# Altium PCB microd-header-adapter-board-rev2.PcbDoc
Units mm, origin at the board's own origin, x right, y up, seen from the top; angles counter-clockwise.
Board outline 44 x 66 mm, 2 copper layers (Top Layer, Bottom Layer); 16 components, 21 nets, 73 pads, 0 vias.
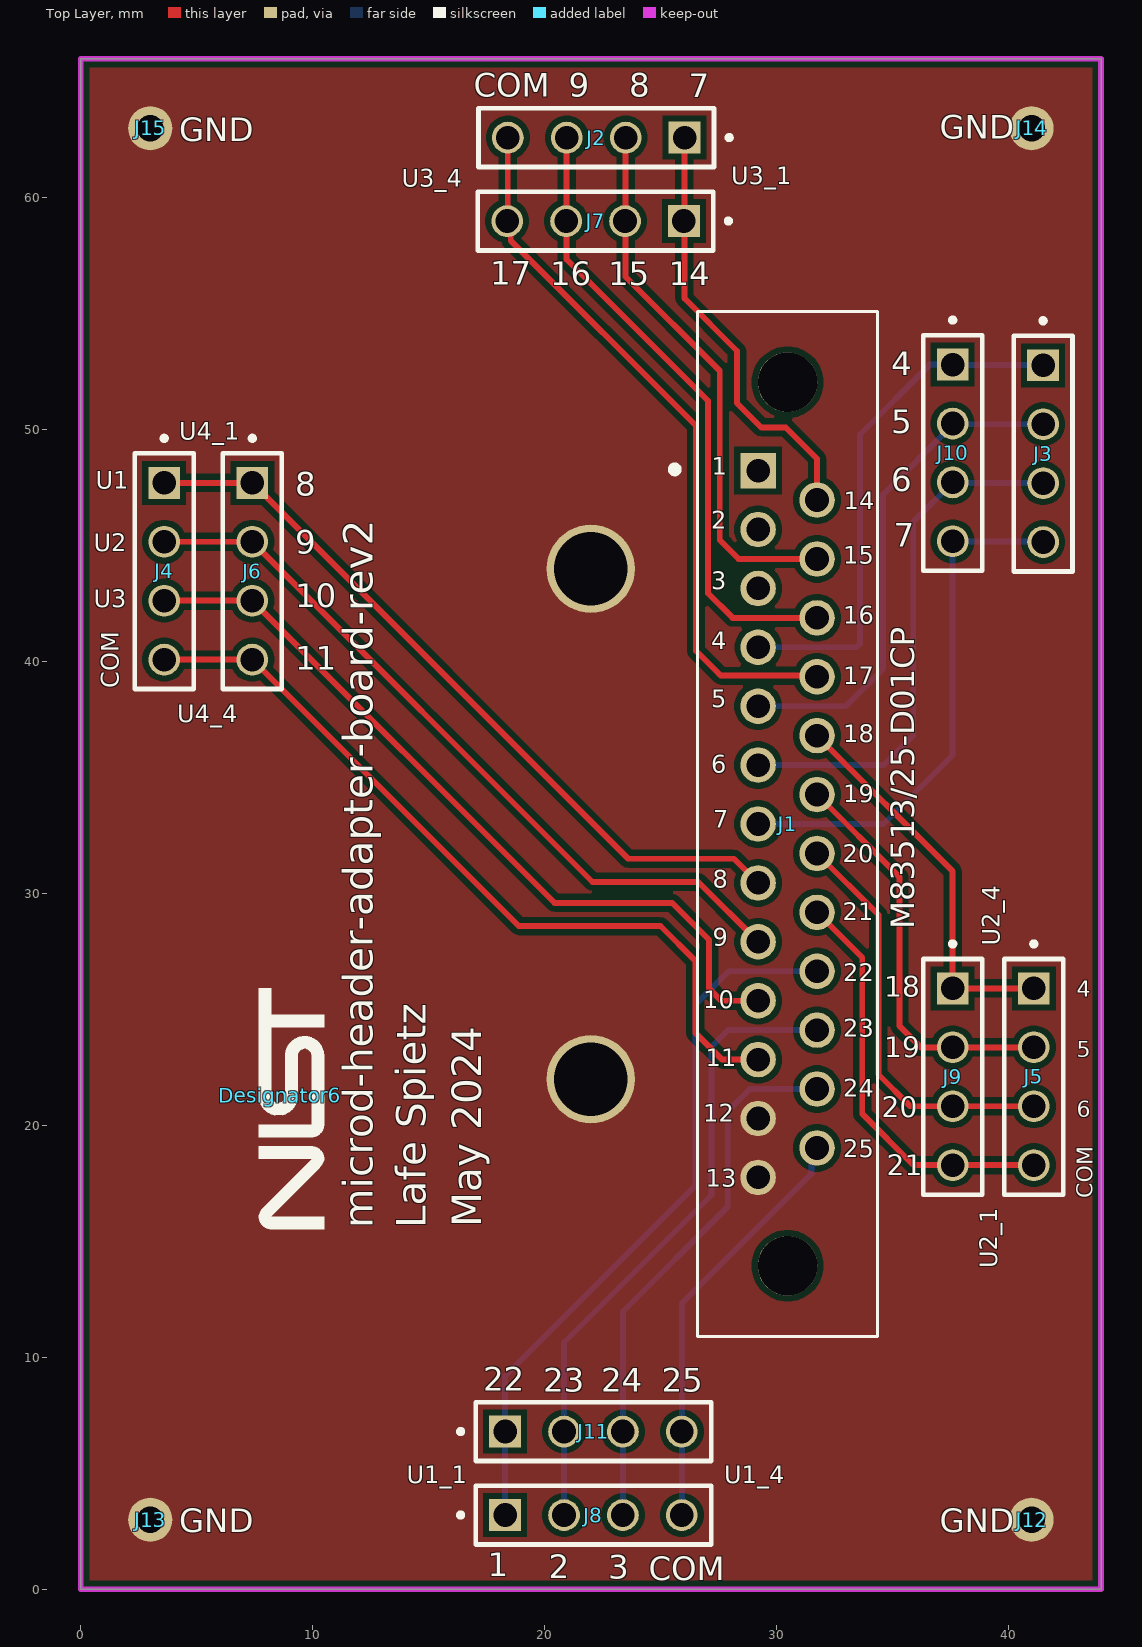
[diagram p0: Top Layer view]
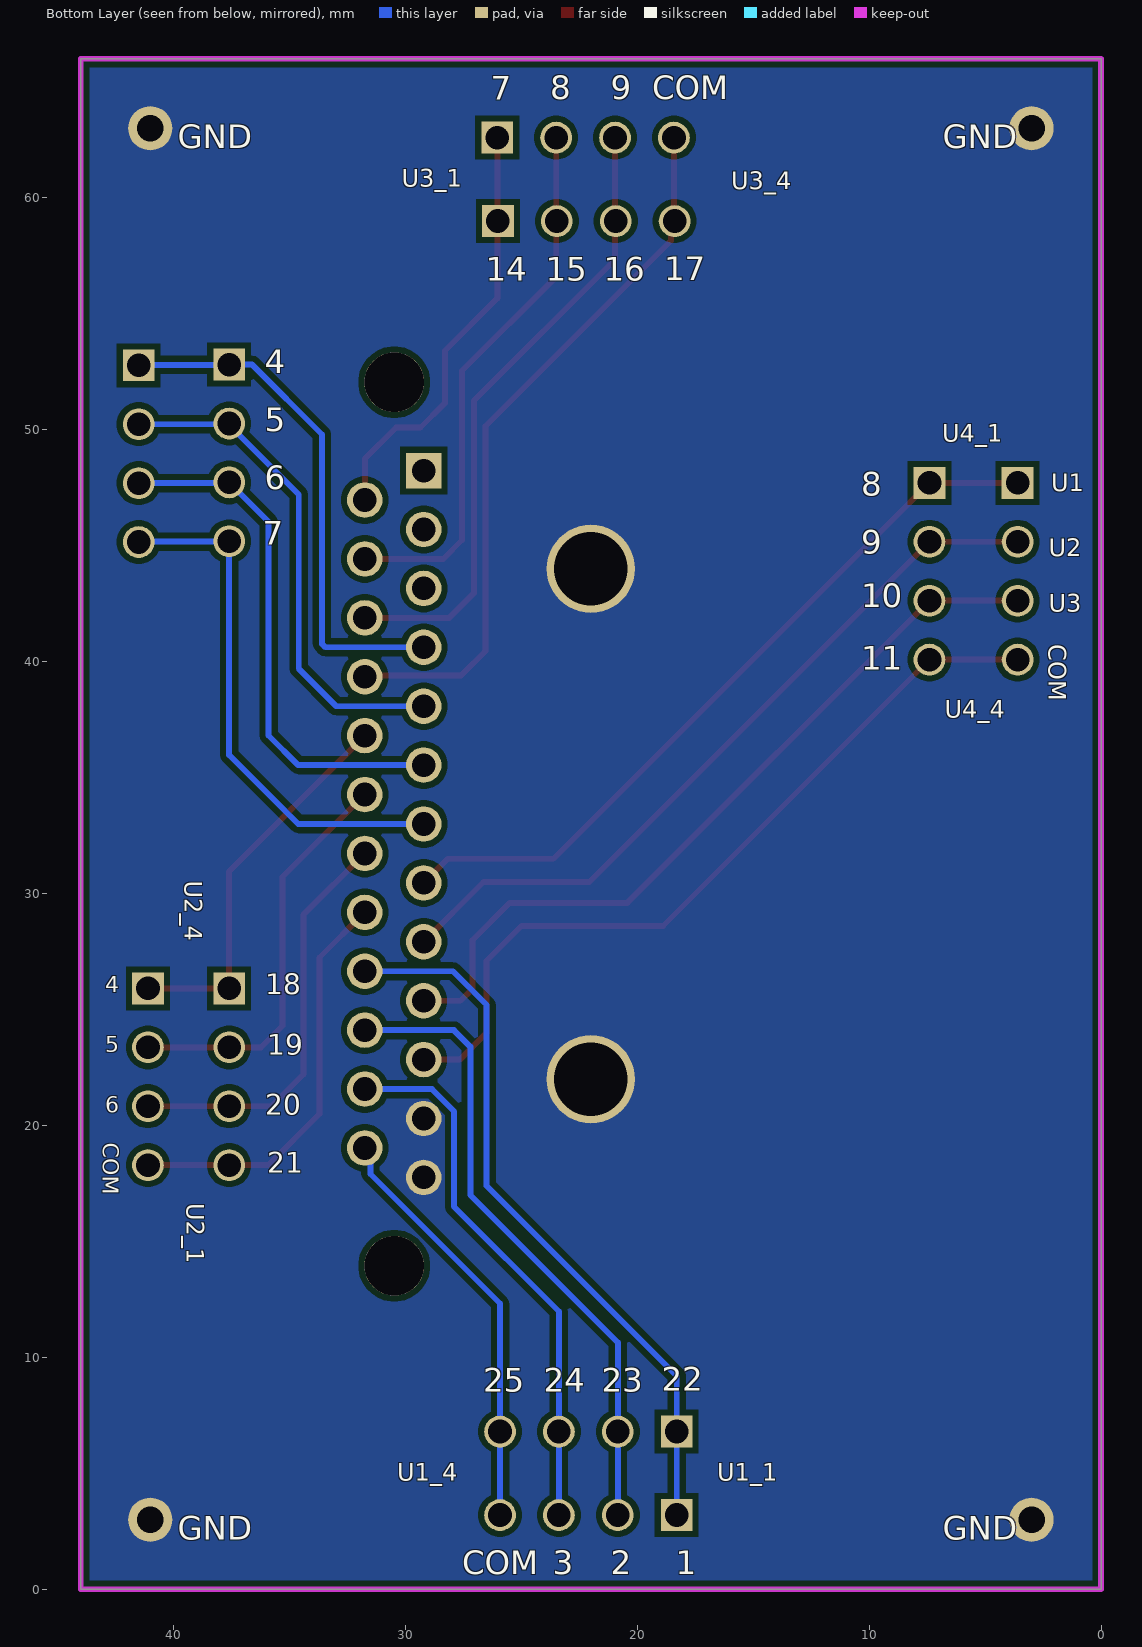
[diagram p1: Bottom Layer view, seen from below]

## Layer stack, top to bottom
Top Solder: solder mask 0.0102, Solder Resist, Dk 3.5
Top Layer: signal copper 0.0356
Dielectric 1: dielectric 0.32, FR-4, Dk 4.8
Bottom Layer: signal copper 0.0356
Bottom Solder: solder mask 0.0102, Solder Resist, Dk 3.5

## Board outline
0,0 0,66 44,66 44,0

## Design rules (kind name [scope] priority, off if disabled: settings)
Clearance [All] p1: gap=0.254 ignorepadtopadclearanceinfootprint=FALSE except(0: Arc-Hole Track-Hole SMDPad-Hole THPad-Hole Via-Hole Fill-Hole Poly-Hole Region-Hole Text-Hole)
PolygonConnect [All] p1: connectstyle=Direct reliefconductorwidth=0.254 reliefentries=4 polygonreliefangle="90 Angle" airgapwidth=0.254
RoutingVias [All] p1: holewidth=0.711 width=1.27 viastyle="Through Hole" minholewidth=0.711 minwidth=1.27 maxholewidth=0.711 maxwidth=1.27
SolderMaskExpansion [All] p1: expansion=0.102 istentingtop=FALSE
Width [All] p1: maxlimit=0.254 minlimit=0.254 preferedwidth=0.254
30 further rules are at their usual default settings.

## Classes and differential pairs
component class microd-header-adapter-board-rev2: J1 J2 J3 J4 J5 J6 J7 J8 J9 J10 J11 J12 J13 J14 J15

## Components (designator, comment, footprint, x,y, rotation, side; value= is the part's Value field where it differs from the comment)
Designator6 "Comment" "NIST logo - TopOverlay" 8.575,21.3 r90 top
J1 "M83513/25-D01CP" BEL_M83513/25-D01CP 30.48,33 r90 top
J2 "TSW-104-07-G-S" SAMTEC_TSW-104-07-G-S 22.23,62.6 r180 top
J3 "TSW-104-07-G-S" SAMTEC_TSW-104-07-G-S 41.5,48.97 r270 top
J4 "TSW-104-07-G-S" SAMTEC_TSW-104-07-G-S 3.6,43.9 r270 top
J5 "TSW-104-07-G-S" SAMTEC_TSW-104-07-G-S 41.1,22.1 r270 top
J6 "TSW-104-07-G-S" SAMTEC_TSW-104-07-G-S 7.4,43.9 r270 top
J7 "TSW-104-07-G-S" SAMTEC_TSW-104-07-G-S 22.2,59 r180 top
J8 "TSW-104-07-G-S" SAMTEC_TSW-104-07-G-S 22.11,3.2 r0 top
J9 "TSW-104-07-G-S" SAMTEC_TSW-104-07-G-S 37.6,22.1 r270 top
J10 "TSW-104-07-G-S" SAMTEC_TSW-104-07-G-S 37.6,49 r270 top
J11 "TSW-104-07-G-S" SAMTEC_TSW-104-07-G-S 22.11,6.8 r0 top
J12 "Single Pin" "Single PC Pin" 41,3 r0 top
J13 "Single Pin" "Single PC Pin" 3,3 r0 top
J14 "Single Pin" "Single PC Pin" 41,63 r0 top
J15 "Single Pin" "Single PC Pin" 3,63 r0 top

## Footprints (in the part's own frame and the unit in brackets; to place one, negate y for a bottom-side part, rotate by r counter-clockwise, add the part's x,y. Pads: shape width x height; smd on the part's side, far side on the other; paste and mask are expansions set on the pad)
BEL_M83513/25-D01CP [mm]
  rect 1.53x1.53 hole 1.02: 1(15.24,1.27)
  round 1.53 hole 1.02: 2(12.7,1.27) 3(10.16,1.27) 4(7.62,1.27) 5(5.08,1.27) 6(2.54,1.27) 7(0,1.27) 8(-2.54,1.27) 9(-5.08,1.27) 10(-7.62,1.27) 11(-10.16,1.27) 12(-12.7,1.27) 13(-15.24,1.27) 14(13.97,-1.27) 15(11.43,-1.27) 16(8.89,-1.27) 17(6.35,-1.27) 18(3.81,-1.27) 19(1.27,-1.27) 20(-1.27,-1.27) 21(-3.81,-1.27) 22(-6.35,-1.27) 23(-8.89,-1.27) 24(-11.43,-1.27) 25(-13.97,-1.27)
  round 2.57 hole 2.57 unplated: ""(-19.05,0) ""(19.05,0)
  silkscreen extent -22.1,-3.88 22.1,5.01
"NIST logo - TopOverlay" [mm]
  silkscreen extent -5.77,-1.92 4.61,0.9
SAMTEC_TSW-104-07-G-S [mm]
  rect 1.37x1.37 / inner round 1.37 / far side rect 1.37x1.37 hole 1.02: 01(-3.81,0)
  round 1.37 hole 1.02: 02(-1.27,0) 03(1.27,0) 04(3.81,0)
  silkscreen extent -5.83,-1.27 5.08,1.27
"Single PC Pin" [mil]
  round 75 hole 45: 1(0,0)

## Part data
J1: "MIL-DTL-83513 PCB Mounted Connector", Package=None, Availability=Unavailable, MP=M83513/25-D01CP, Price=None
J2 J3 J4 J5 J6 J7 J8 J9 J10 J11: "<a href=\"https://pricing.snapeda.com/parts/TSW-104-07-G-S/Samtec/view-part?ref=eda\">Check availability</a>", Package=None, Availability=Unavailable, MP=altium_native_batch, Price=None
J12 J13 J14 J15: library part "Single PC Pin", Supplier Part Number 1=575-2617001340000, Supplier 1=Mouser

## Free pads (board coordinates)
  round 3.81 hole 3.175: 9(22,22) 10(22,44)

## Nets (pads, with @x,y where several pads share a name; then routed paths per layer and width w, separated by ;. In a path a pad name is that pad's centre, name@x,y a point inside that pad or via, vN(x,y) a via of type N, cw(c..) or ccw(c..) an arc to the next point about the centre after c; other vN are vias at no path point)
GND: J1.12 J1.13 J12.1 J13.1 J14.1 J15.1 pad.9 pad.10
NetJ1_4: J1.4 J3.01 J10.01 | length 22.8
  Bottom Layer w0.254: J1.4 33.451,40.62 33.6,40.769 33.6,49.8 36.61,52.81 J10.01 ; J10.01@37.6,52.8 J3.01@41.7,52.8
NetJ1_5: J1.5 J3.02 J10.02 | length 21.7
  Bottom Layer w0.254: J1.5 32.98,38.08 34.6,39.7 34.6,47.21 37.63,50.24 J3.02
NetJ1_6: J1.6 J3.03 J10.03 | length 23
  Bottom Layer w0.254: J1.6 34.621,35.54 35.9,36.819 35.9,46.03 J10.03 ; J10.03@37.83,47.7 J3.03@42.023,47.7
NetJ1_7: J1.7 J3.04 J10.04 | length 23.2
  Bottom Layer w0.254: J1.7@28.8,33 J1.7 34.621,33 37.6,35.979 J10.04 37.615,45.175 41.485,45.175 J3.04
NetJ1_8: J1.8 J4.01 J6.01 | length 32.8
  Top Layer w0.254: J4.01 J6.01 23.61,31.5 28.17,31.5 J1.8
NetJ1_9: J1.9 J4.02 J6.02 | length 32.8
  Top Layer w0.254: J4.02 J6.02 22.07,30.5 26.63,30.5 J1.9
NetJ1_10: J1.10 J4.03 J6.03 | length 34
  Top Layer w0.254: J4.03 J6.03 20.43,29.6 25.5,29.6 27.1,28 27.1,25.9 27.62,25.38 J1.10
NetJ1_11: J1.11 J4.04 J6.04 | length 34.6
  Top Layer w0.254: J4.04 J6.04 18.89,28.6 25,28.6 26.5,27.1 26.5,24 27.66,22.84 J1.11
NetJ1_14: J1.14 J2.01 J7.01 | length 18.6
  Top Layer w0.254: J2.01@26.035,62.6 26.035,55.665 28.3,53.4 28.3,51.149 29.349,50.1 30.4,50.1 31.75,48.75 J1.14
NetJ1_15: J1.15 J2.02 J7.02 | length 23.6
  Top Layer w0.254: J2.02@23.495,62.6 23.495,59 23.495,56.605 27.556,52.544 27.556,45.244 28.37,44.43 J1.15
NetJ1_16: J1.16 J2.03 J7.03 | length 27.3
  Top Layer w0.254: J2.03@20.955,62.6 20.955,59 20.955,57.345 27.048,51.252 27.048,42.952 28.11,41.89 J1.16
NetJ1_17: J1.17 J2.04 J7.04 | length 31.2
  Top Layer w0.254: J2.04@18.415,62.6 18.415,59 18.545,58.87 18.545,58.155 26.54,50.16 26.54,40.46 26.584,40.416 27.526,39.474 27.6,39.4 30.477,39.4 31.287,39.4 cw(c30.81,32.816) J1.17
NetJ1_18: J1.18 J5.01 J9.01 | length 16.8
  Top Layer w0.254: J1.18 37.6,30.96 J9.01 J5.01
NetJ1_19: J1.19 J5.02 J9.02 | length 17.6
  Top Layer w0.254: J1.19 35.3,30.72 35.3,24.3 36.23,23.37 J9.02 J5.02
NetJ1_20: J1.20 J5.03 J9.03 | length 17.9
  Top Layer w0.254: J1.20 34.4,29.08 34.4,22.2 35.77,20.83 J9.03 J5.03
NetJ1_21: J1.21 J5.04 J9.04 | length 17.8
  Top Layer w0.254: J1.21 33.7,27.24 33.7,20.5 35.91,18.29 J9.04 J5.04
NetJ1_22: J1.22 J8.01 J11.01 | length 31.2
  Bottom Layer w0.254: J8.01 J11.01 18.3,9.2 26.5,17.4 26.5,25.2 27.95,26.65 J1.22
NetJ1_23: J1.23 J8.02 J11.02 | length 27.7
  Bottom Layer w0.254: J8.02 J11.02 20.84,10.64 27.2,17 27.2,23.4 27.91,24.11 J1.23
NetJ1_24: J1.24 J8.03 J11.03 | length 23.5
  Bottom Layer w0.254: J8.03 J11.03 23.38,11.98 27.9,16.5 27.9,20.611 28.859,21.57 J1.24
NetJ1_25: J1.25 J8.04 J11.04 | length 18.2
  Bottom Layer w0.254: J8.04 J11.04 25.92,12.32 31.506,17.906 31.506,18.786 J1.25
pads on no net: J1. J1.1 J1.2 J1.3

## Polygon pours and split planes (outlines as drawn)
GND on Top Layer "NONET_L02_P-001" (solid, pour order 0): 43.942,66.02 -0.058,66.02 -0.058,0.02 43.942,0.02
GND on Bottom Layer "NONET_L02_P-001" (solid, pour order 1): 44,0.02 0,0.02 0,66.02 44,66.02

## Keep-outs
Keep-Out Layer:
  the board outline again, w0.254

## Silkscreen, mask and mechanical layers (free items; w line width, h text height)
Top Overlay:
  text "COM" at 16.952,64.352 h1.02
  text "9" at 21.052,64.352 h1.02
  text "8" at 23.652,64.352 h1.02
  text "7" at 26.229,64.34 h1.02
  text "GND" at 37.052,62.552 h1.02
  text "GND" at 4.252,62.452 h1.02
  text "U3_1" at 28.052,60.579 h0.76
  text "U3_4" at 13.852,60.479 h0.76
  text "17" at 17.652,56.252 h1.02
  text "16" at 20.248,56.227 h1.02
  text "15" at 22.748,56.227 h1.02
  text "14" at 25.348,56.227 h1.02
  text "4" at 34.952,52.352 h1.02
  text "5" at 34.952,49.852 h1.02
  text "U4_1" at 4.252,49.579 h0.76
  text "1" at 27.201,48.066 h0.76
  text "U1" at 0.652,47.452 h0.76
  text "6" at 34.952,47.352 h1.02
  text "8" at 9.252,47.152 h1.02
  text "14" at 32.901,46.566 h0.76
  text "2" at 27.185,45.728 h0.76
  text "7" at 35.052,44.952 h1.02
  text "U2" at 0.552,44.752 h0.76
  text "9" at 9.252,44.652 h1.02
  text "15" at 32.885,44.228 h0.76
  text "3" at 27.185,43.128 h0.76
  text "U3" at 0.552,42.352 h0.76
  text "10" at 9.252,42.352 h1.02
  text "16" at 32.885,41.628 h0.76
  text "4" at 27.185,40.528 h0.76
  text "11" at 9.252,39.652 h1.02
  text "17" at 32.885,39.028 h0.76
  text "COM" at 1.648,38.852 h0.76 r90
  text "5" at 27.185,38.028 h0.76
  text "U4_4" at 4.152,37.379 h0.76
  text "18" at 32.885,36.528 h0.76
  text "6" at 27.187,35.209 h0.76
  text "19" at 32.885,33.928 h0.76
  text "7" at 27.285,32.828 h0.76
  text "20" at 32.852,31.352 h0.76
  text "8" at 27.252,30.252 h0.76
  text "21" at 32.852,28.852 h0.76
  text "M83513/25-D01CP" at 35.948,28.452 h1.02 r90
  text "9" at 27.252,27.752 h0.76
  text "U2_4" at 39.621,27.752 h0.76 r90
  text "22" at 32.885,26.228 h0.76
  text "18" at 34.652,25.552 h0.89
  text "4" at 42.952,25.552 h0.7
  text "10" at 26.852,25.052 h0.76
  text "23" at 32.885,23.828 h0.76
  text "19" at 34.652,22.952 h0.89
  text "5" at 42.952,22.952 h0.7
  text "11" at 26.952,22.552 h0.76
  text "24" at 32.885,21.228 h0.76
  text "20" at 34.552,20.352 h0.89
  text "6" at 42.952,20.352 h0.7
  text "12" at 26.852,20.152 h0.76
  text "25" at 32.885,18.628 h0.76
  text "21" at 34.752,17.852 h0.89
  text "13" at 26.952,17.352 h0.76
  text "COM" at 43.648,16.852 h0.7 r90
  text "May 2024" at 17.261,15.602 h1.27 r90
  text "microd-header-adapter-board-rev2" at 12.599,15.577 h1.27 r90
  text "Lafe Spietz" at 14.874,15.577 h1.27 r90
  text "U2_1" at 39.521,13.852 h0.76 r90
  text "22" at 17.352,8.552 h1.02
  text "23" at 19.948,8.527 h1.02
  text "24" at 22.448,8.527 h1.02
  text "25" at 25.048,8.527 h1.02
  text "U1_1" at 14.052,4.579 h0.76
  text "U1_4" at 27.752,4.579 h0.76
  text "GND" at 4.252,2.452 h1.02
  text "GND" at 37.052,2.452 h1.02
  text "1" at 17.552,0.552 h1.02
  text "2" at 20.187,0.473 h1.02
  text "3" at 22.752,0.452 h1.02
  text "COM" at 24.485,0.383 h1.02
Bottom Overlay:
  text "COM" at 19.348,64.252 h1.02
  text "9" at 21.148,64.252 h1.02
  text "8" at 23.748,64.252 h1.02
  text "7" at 26.324,64.24 h1.02
  text "GND" at 6.818,62.137 h1.02
  text "GND" at 39.818,62.137 h1.02
  text "U3_1" at 30.148,60.479 h0.76
  text "U3_4" at 15.948,60.379 h0.76
  text "17" at 18.848,56.452 h1.02
  text "16" at 21.443,56.427 h1.02
  text "15" at 23.943,56.427 h1.02
  text "14" at 26.543,56.427 h1.02
  text "4" at 36.059,52.435 h1.02
  text "5" at 36.059,49.935 h1.02
  text "U4_1" at 6.848,49.479 h0.76
  text "6" at 36.059,47.435 h1.02
  text "U1" at 2.148,47.352 h0.76
  text "8" at 10.348,47.152 h1.02
  text "7" at 36.159,45.035 h1.02
  text "9" at 10.348,44.652 h1.02
  text "U2" at 2.248,44.552 h0.76
  text "10" at 10.348,42.352 h1.02
  text "U3" at 2.248,42.152 h0.76
  text "COM" at 2.248,40.748 h0.76 r90
  text "11" at 10.348,39.652 h1.02
  text "U4_4" at 6.748,37.579 h0.76
  text "U2_4" at 39.521,30.548 h0.76 r90
  text "4" at 42.948,25.752 h0.7
  text "18" at 36.048,25.652 h0.89
  text "5" at 42.948,23.152 h0.7
  text "19" at 35.948,23.052 h0.89
  text "6" at 42.948,20.552 h0.7
  text "20" at 36.048,20.452 h0.89
  text "COM" at 43.048,19.248 h0.7 r90
  text "21" at 35.948,17.952 h0.89
  text "U2_1" at 39.421,16.648 h0.76 r90
  text "22" at 18.948,8.552 h1.02
  text "23" at 21.543,8.527 h1.02
  text "24" at 24.043,8.527 h1.02
  text "25" at 26.643,8.527 h1.02
  text "U1_1" at 16.548,4.679 h0.76
  text "U1_4" at 30.348,4.679 h0.76
  text "GND" at 6.818,2.137 h1.02
  text "GND" at 39.818,2.137 h1.02
  text "1" at 18.348,0.652 h1.02
  text "2" at 21.148,0.652 h1.02
  text "3" at 23.648,0.652 h1.02
  text "COM" at 27.548,0.652 h1.02
Top Solder:
  rectangle: 18,40 26,48
  rectangle: 18,18 26,26
Bottom Solder:
  rectangle: 18,40 26,48
  rectangle: 18,18 26,26